# EAGLE board board (EAGLE 7.3.0)
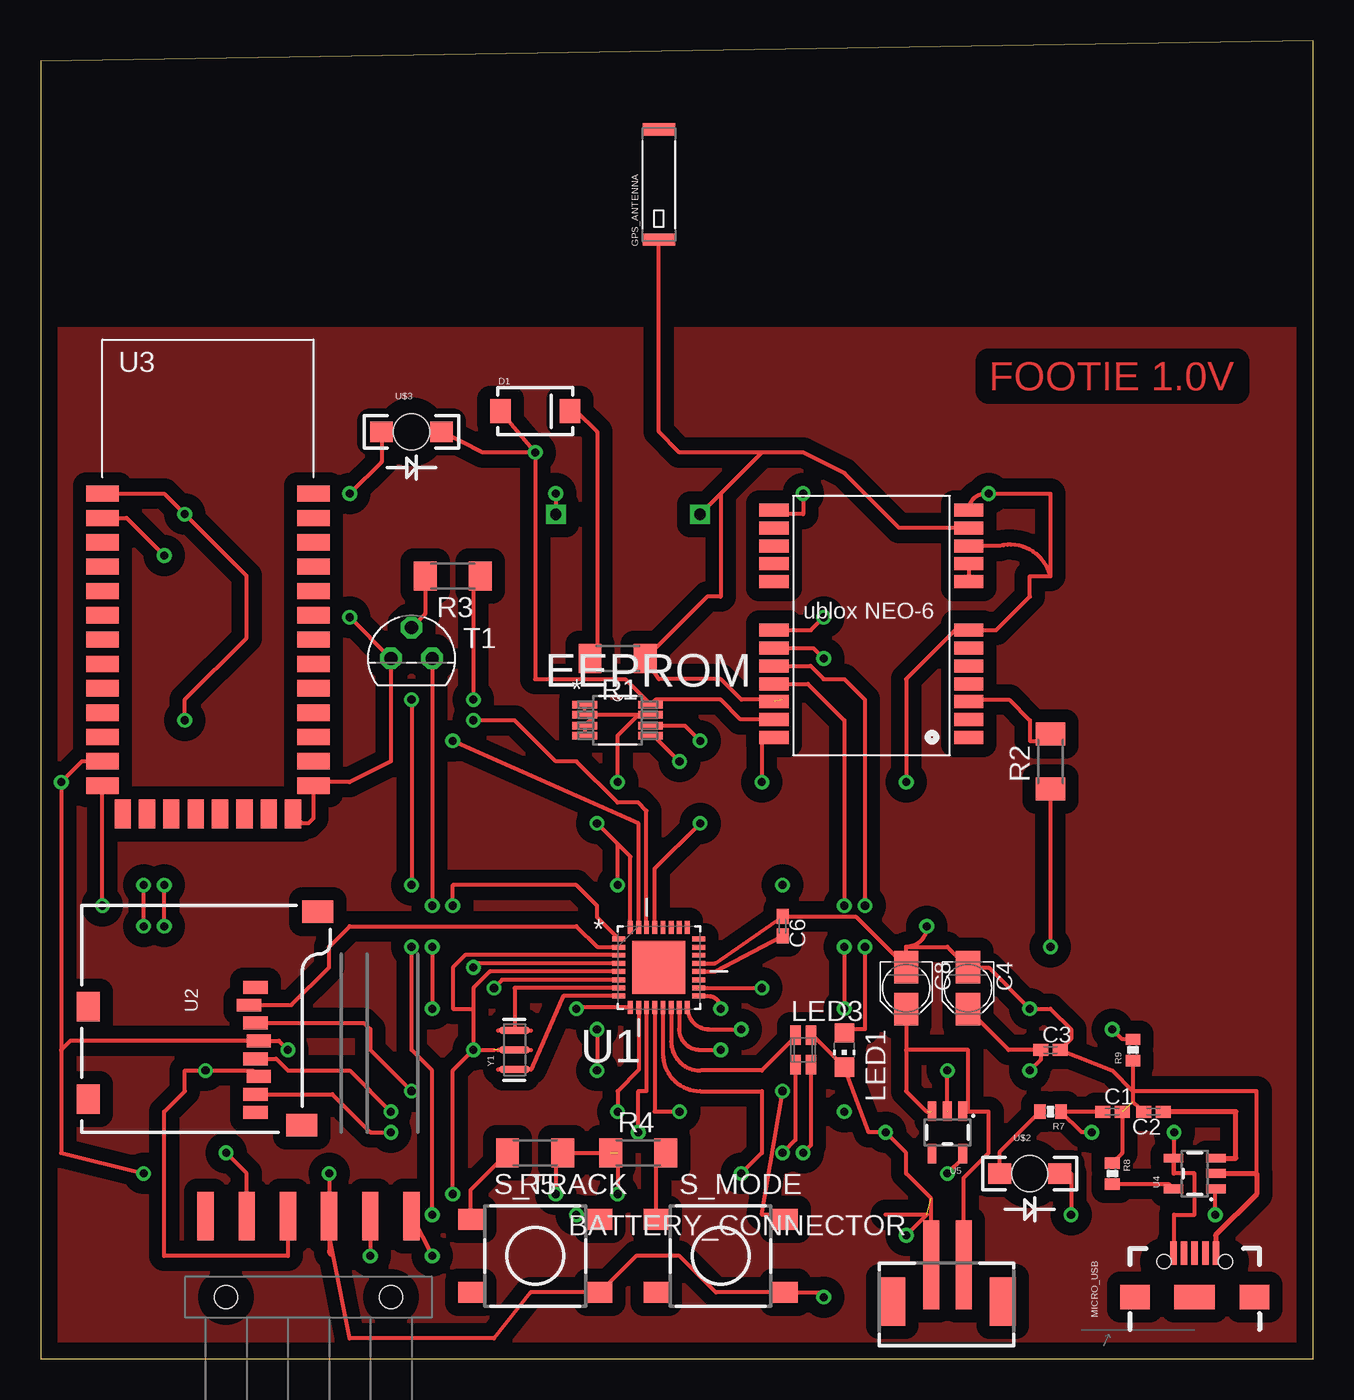
[diagram p0: board, top side]
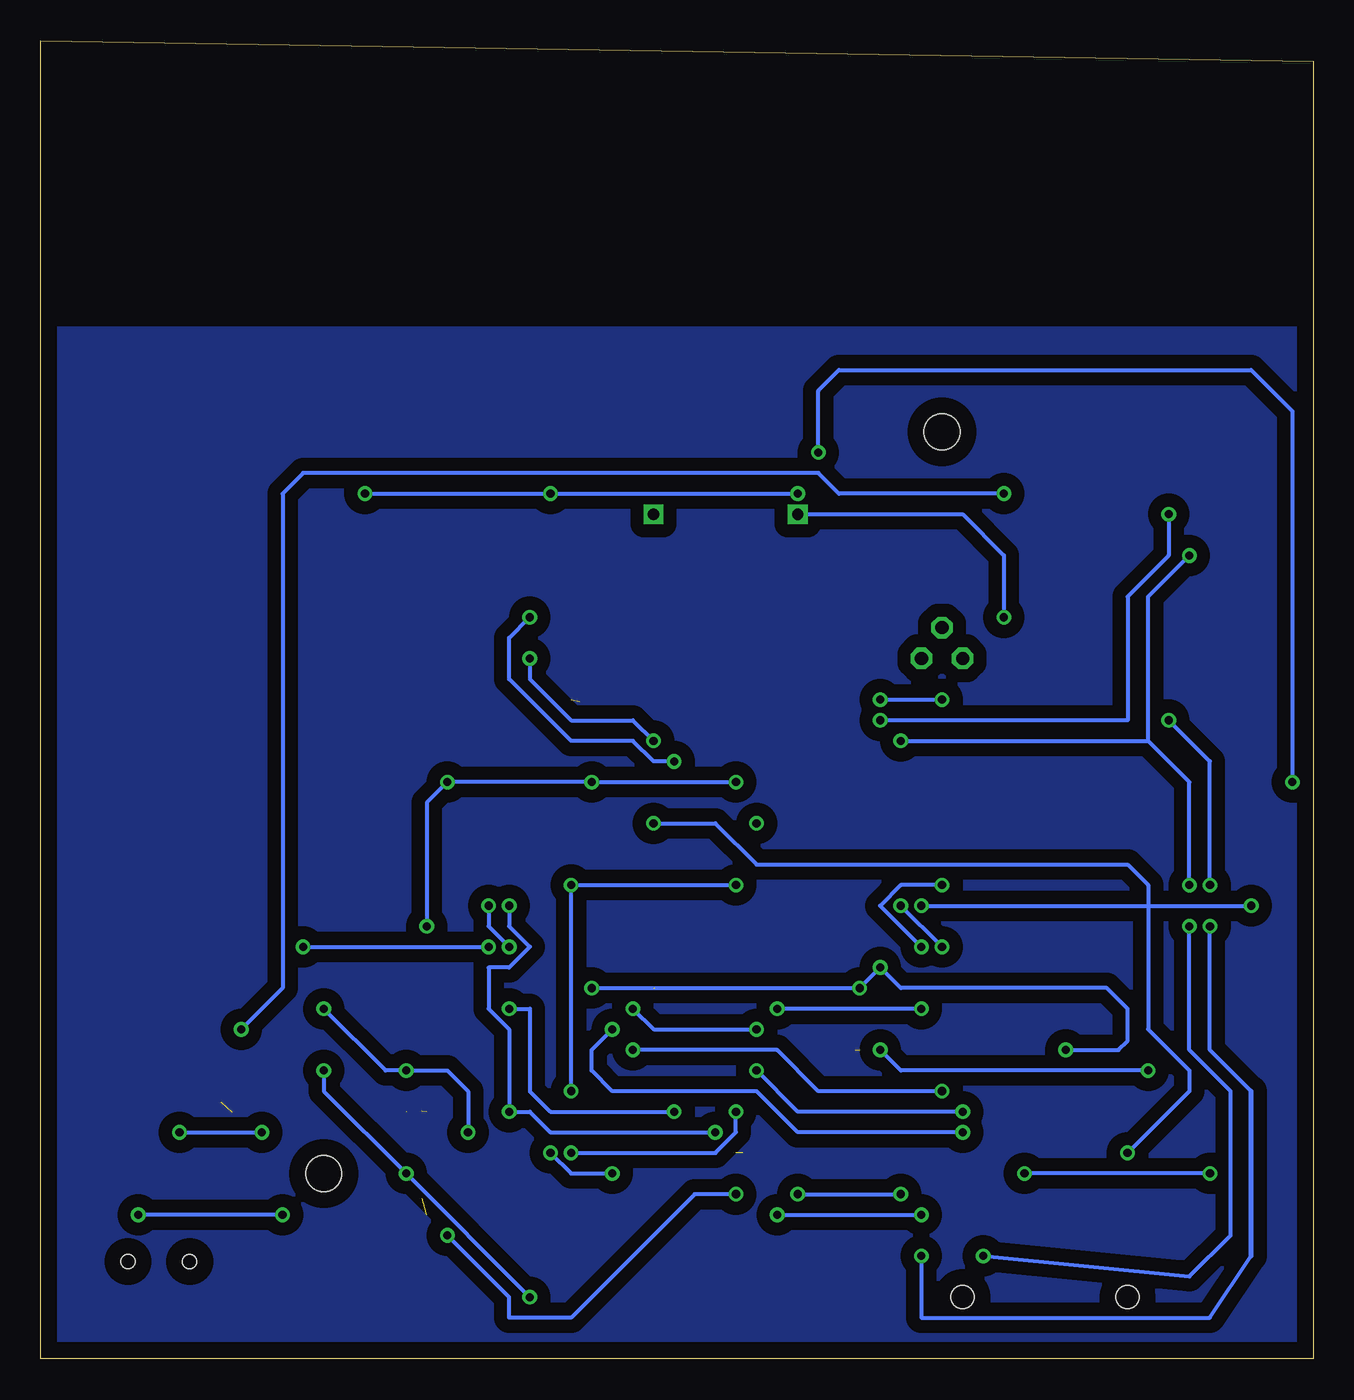
[diagram p1: board, bottom side, seen from below]

Size 78.41 x 81.27 mm. Coordinates in mm from the lower left corner, seen from the top.
Outline: 0,0 78.41,0 78.41,81.27 0,80 0,0
Copper layers (1*16): Top 0.035mm / dielectric 1.5mm / Bottom 0.035mm
Design rules "default": minimum track width 10mil, minimum drill 24mil, track to track 8mil, track to pad 8mil, pad to pad 8mil, via to via 8mil, smd to smd 8mil, copper to edge 40mil, drill to drill 8mil, minimum pad ring 10mil, minimum via ring 8mil, stop-mask expansion 4mil, vias tented up to drill 0mil, thermal gap 10mil

## Footprints (pad centres in the part's own frame; a part is rotated, then mirrored left to right if it is on the bottom)
JST-2-SMD-VERT = smd 1 x 5.5: GND 1,-2; VCC -1,-2 | smd 1.6 x 3: P$1 -3.4,0.27; P$2 3.4,0.27
C0402K = smd 0.925 x 0.74: 1 -0.6,0; 2 0.6,0
PANASONIC_A = smd 2 x 1.5: + 1.3,0; - -1.3,0
SMA-DIODE = smd 1.27 x 1.47: A -2.15,0; C 2.15,0
SOP65P490X110-8N = smd 1.524 x 0.457: 1 -2.032,0.965; 2 -2.032,0.33; 3 -2.032,-0.33; 4 -2.032,-0.965; 5 2.032,-0.965; 6 2.032,-0.33; 7 2.032,0.33; 8 2.032,0.965
ANTENNA-CHIP6 = smd 0.75 x 2: 1 -3.4,0; NC 3.4,0
1X06-SMD = smd 1 x 3: 1 -6.35,5; 2 -3.81,5; 3 -1.27,5; 4 1.27,5; 5 3.81,5; 6 6.35,5 | hole 1.4: -5.08,0; 5.08,0
CHIP-LED0805 = smd 1.2 x 1.2: A 0,-1.05; C 0,1.05
GM1WA55311A = smd 0.65 x 1.2: 1 -0.475,0.9; 2 -0.475,-0.9; 3 0.475,-0.9; 4 0.475,0.9
USB-B-MICRO-SMD_V03 = smd 1.45 x 0.4: D+1 2.725,0; D-1 2.725,0.65; GND1 2.725,-1.3; ID1 2.725,-0.65; VBUS1 2.725,1.3 | smd 1.5 x 1.8: SHIELD1 0,3.685; SHIELD2 0,-3.685 | smd 1.5 x 2.5: SHIELD3 0,0 | hole 0.85: 2.2,1.9; 2.2,-1.9
M1406 = smd 1.4 x 1.8: 1 -1.7,0; 2 1.7,0
0402-RES = smd 0.7 x 0.9: 1 -0.65,0; 2 0.65,0
DTSM-6 = smd 1.55 x 1.3: 1 -3.975,2.25; 2 3.975,2.25; 3 -3.975,-2.25; 4 3.975,-2.25
TO92 = drill 0.813 octagon: 1 1.27,0; 2 0,1.905; 3 -1.27,0
QFN50P500X500X100-33N = smd 0.813 x 0.305: 1 -2.464,1.753; 2 -2.464,1.245; 3 -2.464,0.762; 4 -2.464,0.254; 5 -2.464,-0.254; 6 -2.464,-0.762; 7 -2.464,-1.245; 8 -2.464,-1.753; 17 2.464,-1.753; 18 2.464,-1.245; 19 2.464,-0.762; 20 2.464,-0.254; 21 2.464,0.254; 22 2.464,0.762; 23 2.464,1.245; 24 2.464,1.753 | smd 0.305 x 0.813: 9 -1.753,-2.464; 10 -1.245,-2.464; 11 -0.762,-2.464; 12 -0.254,-2.464; 13 0.254,-2.464; 14 0.762,-2.464; 15 1.245,-2.464; 16 1.753,-2.464; 25 1.753,2.464; 26 1.245,2.464; 27 0.762,2.464; 28 0.254,2.464; 29 -0.254,2.464; 30 -0.762,2.464; 31 -1.245,2.464; 32 -1.753,2.464 | smd 3.251 x 3.251: 33 0,0
MICRO-SD-SOCKET-PP = smd 0.8 x 1.5: 1 -8.94,10.7; 2 -7.84,10.3; 3 -6.74,10.7; 4 -5.64,10.9; 5 -4.54,10.7; 6 -3.44,10.9; 7 -2.34,10.7; 8 -1.24,10.7 | smd 1.8 x 1.4: CD1 -2.05,0.4; CD2 -7.75,0.4 | smd 1.4 x 1.9: GND1 -13.6,14.55; GND3 -0.45,13.55
BLUETOOTH_SMD = smd 2 x 1: 1 0,0; 2 0,-1.5; 3 0,-3; 4 0,-4.5; 5 0,-6; 6 0,-7.5; 7 0,-9; 8 0,-10.5; 9 0,-12; 10 0,-13.5; 11 0,-15; 12 0,-16.5; 13 0,-18; 22 13,-18; 23 13,-16.5; 24 13,-15; 25 13,-13.5; 26 13,-12; 27 13,-10.5; 28 13,-9; 29 13,-7.5; 30 13,-6; 31 13,-4.5; 32 13,-3; 33 13,-1.5; 34 13,0 | smd 1 x 1.8: 14 1.25,-19.75; 15 2.75,-19.75; 16 4.25,-19.75; 17 5.75,-19.75; 18 7.25,-19.75; 19 8.75,-19.75; 20 10.25,-19.75; 21 11.75,-19.75
SOT23-5 = smd 0.55 x 1.2: 1 -0.95,-1.3; 2 0,-1.3; 3 0.95,-1.3; 4 0.95,1.3; 5 -0.95,1.3
UBLOX_NEO-6P = smd 1.8 x 0.8: 1_RESERVED 6.4,-7.4; 2_SS_N 6.4,-6.3; 3_TIMEPULSE 6.4,-5.2; 4_EXTINT0 6.4,-4.1; 5_USB_DM 6.4,-3; 6_USB_DP 6.4,-1.9; 7_VDDUSB 6.4,-0.8; 8_RESERVED 6.4,2.2; 9_VCC_RF 6.4,3.3; 10_GND 6.4,4.4; 11_RF_IN 6.4,5.5; 12_GND 6.4,6.6; 13_GND -5.6,6.6; 14_MOSI/CFG_COM0 -5.6,5.5; 15_MISO/CFG_COM1 -5.6,4.4; 16_CFG_CPS0/SCK -5.6,3.3; 17_RESERVED -5.6,2.2; 18_SDA2 -5.6,-0.8; 19_SCL2 -5.6,-1.9; 20_TXD1 -5.6,-3; 21_RXD1 -5.6,-4.1; 22_V_BCKP -5.6,-5.2; 23_VCC -5.6,-6.3; 24_GND -5.6,-7.4
HSMC-C265 = smd 1.4 x 1.25: A -1.85,0; C 1.85,0 | hole 2.2: 0,0
VL1220 = drill 0.7 pad 0.75 square: 3V 0,0; GND 8.89,0
RESONATOR-SMD = smd 0.45 x 1.905: 1 -1.2,0; 2 0,0; 3 1.2,0

## Placement (x,y rotation side)
BATTERY_CONNECTOR  3.7v  [JST-2-SMD-VERT]  55.88,3.81 180 top
C1  4.7 uF  [C0402K]  66.04,15.24 0 top
C2  4.7 uF  [C0402K]  68.58,15.24 180 top
C3  4.7 uF  [C0402K]  62.23,19.05 0 top
C4  10 uf  [PANASONIC_A]  57.15,22.86 270 top
C6  0.1 uF  [C0402K]  45.72,26.67 270 top
C8  10 uf  [PANASONIC_A]  53.34,22.86 270 top
D1  [SMA-DIODE]  30.48,58.42 0 top
EEPROM  24LC32A-I/MS  [SOP65P490X110-8N]  35.56,39.37 0 top
GPS_ANTENNA  ANTENNA2SMD6  [ANTENNA-CHIP6]  38.1,72.39 90 top
JP1  RA 6Pin SMD  [1X06-SMD]  16.51,3.81 0 top
LED1  [CHIP-LED0805]  49.53,19.05 180 top
LED3  GM1WA55311A  [GM1WA55311A]  46.99,19.05 0 top
MICRO_USB  5V  [USB-B-MICRO-SMD_V03]  71.12,3.81 90 top
R1  [M1406]  35.56,43.18 180 top
R2  [M1406]  62.23,36.83 90 top
R3  100 ohm  [M1406]  25.4,48.26 180 top
R4  [M1406]  36.83,12.7 0 top
R5  [M1406]  30.48,12.7 180 top
R7  330  [0402-RES]  62.23,15.24 180 top
R8  2K  [0402-RES]  66.04,11.43 270 top
R9  10k  [0402-RES]  67.31,19.05 90 top
S_MODE  DTSM-6  [DTSM-6]  41.91,6.35 0 top
S_TRACK  DTSM-6  [DTSM-6]  30.48,6.35 0 top
T1  2N3565  [TO92]  22.86,43.18 0 top
U1  ATMEGA328P-MU  [QFN50P500X500X100-33N]  38.1,24.13 0 top
U2  USD-SOCKETNEW  [MICRO-SD-SOCKET-PP]  2.54,13.97 270 top
U3  HC_05  [BLUETOOTH_SMD]  3.81,53.34 0 top
U4  MCP73831  [SOT23-5]  71.12,11.43 90 top
U5  3.3 regulator  [SOT23-5]  55.88,13.97 180 top
U$1  UBLOX_NEO-6  [UBLOX_NEO-6P]  50.8,45.72 0 top
U$2  HSMC-C265  [HSMC-C265]  60.96,11.43 0 top
U$3  HSMC-C265  [HSMC-C265]  22.86,57.15 0 top
U$4  VL1220/HFN  [VL1220]  40.64,52.07 180 top
Y1  8MHZ  [RESONATOR-SMD]  29.21,19.05 90 top

## Library data of the parts
BATTERY_CONNECTOR = SparkFun-Connectors
C1-C4 C6 C8 = resistor
D1 = SparkFun-DiscreteSemi
EEPROM = Microchip_By_element14_Batch_1; MPN: 24LC32A-I/MS; OC_FARNELL: 1331330; OC_NEWARK: 69K7672; PACKAGE: 8MSOP; SUPPLIER: Microchip
GPS_ANTENNA = SparkFun-RF
JP1 = SparkFun-Connectors; PROD_ID: CONN-08971
LED1 LED3 = led
MICRO_USB = SparkFun-Connectors; PROD_ID: CONN-11752
R1-R5 = resistor; OHM: 1k
R7-R9 = SparkFun-Passives
S_MODE S_TRACK = switch-tact; OC_FARNELL: unknown
T1 = transistor
U1 = Atmel_By_element14_Batch_1-00; MPN: ATMEGA328P-MU; OC_FARNELL: 1748522; OC_NEWARK: 26R2526; PACKAGE: QFN-32; SUPPLIER: Atmel
U2 = SparkFun-Connectors; PROD_ID: CONN-07820
U3 = SerialPortBluetooth
U4 = SparkFun-PowerIC; PROD_ID: IC-09995
U5 = SparkFun-PowerIC; PROD_ID: VREG-00822
U$1 = Ava
U$2 U$3 = SparkFun-Retired
U$4 = footie
Y1 = SparkFun-FreqCtrl; PROD_ID: XTAL-08900

## Nets
+3V3: C3.1 C4.+ D1.A EEPROM.8 JP1.4 S_MODE.4 S_TRACK.4 U1.4 U1.6 U1.18 U2.4 U3.12 U5.5 U$1.23_VCC U$3.C
ARDUINO_RX: JP1.6 U1.30 U3.1
ARDUINO_TX: JP1.5 U1.31 U3.2
D2: S_MODE.2 U1.32
D3: S_TRACK.2 U1.1
D5: R3.1 U1.9
D6: LED3.2 U1.10
D9: LED3.3 U1.13
D10: LED3.1 U1.14
DTR: JP1.2 U1.29
GPSRX: U1.11 U$1.21_RXD1
GPSTX: U1.12 U$1.20_TXD1
N$1: D1.C R1.2
N$2: C1.1 MICRO_USB.VBUS1 R7.1 U4.4
N$3: R2.2 U$1.3_TIMEPULSE
N$4: LED1.A R2.1
N$5: U$1.8_RESERVED U$1.9_VCC_RF
N$6: R1.1 U$1.22_V_BCKP U$4.3V
N$7: GPS_ANTENNA.1 U$1.11_RF_IN
N$8: R7.2 U$2.A
N$9: R4.2 S_MODE.1
N$10: R5.2 S_TRACK.1
N$11: U4.1 U$2.C
N$12: BATTERY_CONNECTOR.VCC C8.+ U5.1 U5.3
N$13: U1.8 Y1.1
N$14: U1.7 Y1.3
N$15: R8.2 U4.5
N$16: R9.2 U$3.A
N$17: C6.2 U1.20
N$19: R3.2 T1.2
N$20: T1.1 U3.13
N$22: BATTERY_CONNECTOR.GND C1.2 C2.2 C3.2 C4.- C6.1 C8.- EEPROM.1 EEPROM.2 EEPROM.3 EEPROM.4 EEPROM.7 JP1.3 LED1.C LED3.4 MICRO_USB.GND1 R4.1 R5.1 R8.1 R9.1 T1.3 U1.3 U1.5 U1.21 U2.6 U3.21 U3.22 U4.2 U5.2 U$1.7_VDDUSB U$1.10_GND U$1.12_GND U$1.13_GND U$1.24_GND U$4.GND Y1.2
SCL: EEPROM.6 U$1.19_SCL2
SD_CS: U1.2 U2.2
SD_MISO: U1.16 U2.7
SD_MOSI: U1.15 U2.3
SD_SCK: U1.17 U2.5
SDA: EEPROM.5 U$1.18_SDA2
VCC: C2.1 U4.3

## Tracks (layer width: path | path; a pad name or v marks a point on that pad's centre or on a via)
+3V3  (via drill 0.5, 0.5 pad 0.25)  (1 unrouted)
  Top 0.254: v30.48,55.88 27.25,55.88 U$3.C | 18.02,6.4 19.05,1.27 27.94,1.27 30.19,4.1 S_TRACK.4 36.7,6.35 39.37,6.35 41.62,4.1 S_MODE.4 47.97,4.1 v48.26,3.81 | 18.02,6.4 17.78,7.62 | v17.78,11.43 JP1.4 17.78,6.64 arc90 18.02,6.4 | v6.35,11.43 1.27,12.7 1.27,19.05 | 1.27,19.05 v1.27,35.56 2.54,36.83 U3.12 | 1.27,19.05 1.83,19.61 U2.4 14.68,19.61 v15.24,19.05 | U1.6 28.45,23.37 v27.94,22.86 | U1.4 26.92,24.38 v26.67,24.13 | D1.A v30.48,55.88 | v30.48,55.88 30.48,41.91 36.02,41.91 EEPROM.8 37.9,40.64 41.91,40.64 43.13,39.42 U$1.23_VCC | C4.+ 57.15,21.59 | C4.+ 57.18,21.56 | U5.5 56.83,12.38 v55.88,11.43 | v60.96,17.78 61.63,18.45 C3.1 59.66,19.05 C4.+ | 40.64,22.86 v44.45,22.86
  Bottom 0.254: v6.35,11.43 v17.78,11.43 | v15.24,19.05 11.99,19.05 11.43,19.61 11.43,21.59 12.7,22.86 25.4,22.86 v26.67,24.13 v27.94,22.86 v44.45,22.86 | v30.48,55.88 30.48,59.69 29.21,60.96 3.81,60.96 1.27,58.42 v1.27,35.56 | v48.26,3.81 v55.88,11.43 60.96,16.51 v60.96,17.78
ARDUINO_RX  (via drill 0.5)
  Top 0.254: U3.1 7.62,53.34 v8.89,52.07 12.7,48.26 12.7,44.45 8.89,40.64 v8.89,39.37 | U1.30 37.34,33.78 36.83,34.29 35.56,34.29 33.02,36.83 31.75,36.83 29.21,39.37 v26.67,39.37 | JP1.6 v24.13,6.35 | v6.35,26.67 v6.35,29.21
  Bottom 0.254: v8.89,52.07 8.89,49.53 11.43,46.99 11.43,39.37 v26.67,39.37 | v24.13,6.35 24.13,2.54 6.35,2.54 3.81,6.35 | 3.81,16.51 6.35,19.05 v6.35,26.67 | v6.35,29.21 6.35,36.83 v8.89,39.37
  Bottom 0.305: 3.81,6.35 3.81,16.51
ARDUINO_TX  (via drill 0.5)
  Top 0.254: U1.31 36.85,33 v25.4,38.1 | U3.2 5.31,51.84 v7.62,49.53 | JP1.5 v20.32,6.35 | v7.62,26.67 v7.62,29.21
  Bottom 0.254: v25.4,38.1 10.16,38.1 | 10.16,38.1 10.16,46.99 v7.62,49.53 | v20.32,6.35 7.62,5.08 5.08,7.62 5.08,16.51 7.62,19.05 v7.62,26.67 | v7.62,29.21 7.62,35.56 10.16,38.1
D2  (via drill 0.5)
  Top 0.254: U1.32 36.35,30.96 35.56,31.75 | 35.56,31.75 v34.29,33.02 | v45.72,16.51 44.45,8.89 45.72,8.89 S_MODE.2 | v35.56,29.21 35.56,31.75
  Bottom 0.254: v45.72,16.51 v45.72,29.21 v35.56,29.21
D3  (via drill 0.5)
  Top 0.254: v25.4,27.94 25.4,29.21 33.02,29.21 34.29,27.94 34.29,27.23 U1.1 | v22.86,25.4 22.86,19.05 24.13,17.78 v24.13,8.89 | v33.02,8.89 34.29,8.89 S_TRACK.2
  Bottom 0.254: v22.86,25.4 v25.4,27.94 | v33.02,8.89 v24.13,8.89
D5  (via drill 0.5)
  Top 0.254: v24.13,25.4 v24.13,21.59 | v22.86,40.64 v22.86,29.21 | v26.67,40.64 26.67,48.26 R3.1 | U1.9 33.1,21.67 arc90 v33.02,21.59
  Bottom 0.254: v24.13,21.59 v33.02,21.59 | v24.13,25.4 26.67,27.94 25.4,29.21 v22.86,29.21 | v26.67,40.64 v22.86,40.64
D6  (via drill 0.5)
  Top 0.254: LED3.2 46.52,13.49 v45.72,12.7 | U1.10 36.85,17.8 35.56,16.51 v35.56,15.24
  Bottom 0.254: v45.72,12.7 36.83,12.7 35.56,13.97 v35.56,15.24
D9  (via drill 0.5)
  Top 0.254: U1.13 38.35,18.8 arc90 40.64,16.51 44.45,16.51 44.45,12.7 v43.18,11.43 | LED3.3 47.46,13.17 v46.99,12.7
  Bottom 0.254: v46.99,12.7 45.72,11.43 v43.18,11.43
D10
  Top 0.254: U1.14 38.86,19.56 arc90 40.64,17.78 44.45,17.78 46.52,19.84 LED3.1
DTR  (via drill 0.5)
  Top 0.254: U1.29 37.85,30.23 v40.64,33.02 | JP1.2 12.7,11.43 v11.43,12.7
  Bottom 0.254: v40.64,33.02 36.83,33.02 34.29,30.48 11.43,30.48 10.16,29.21 10.16,20.32 7.62,17.78 7.62,16.51 v11.43,12.7
GND
  pour Top (isolate 0.813): 0,0 0,63.5 78.74,63.5 78.74,0
  pour Bottom (isolate 0.813): 0,0 0,63.5 78.74,63.5 78.74,0
GPSRX  (via drill 0.5)
  Top 0.254: U1.11 37.34,16.51 36.83,16.51 v36.83,13.97 | U$1.21_RXD1 47.28,41.62 49.53,39.37 v49.53,27.94
  Bottom 0.254: v49.53,27.94 49.53,26.67 48.26,25.4 49.53,24.13 50.8,24.13 50.8,21.59 49.53,20.32 v49.53,15.24 48.26,15.24 46.99,13.97 v36.83,13.97
GPSTX  (via drill 0.5)
  Top 0.254: U1.12 37.85,15.24 v39.37,15.24 | U$1.20_TXD1 47.45,42.72 48.26,41.91 49.53,41.91 50.8,40.64 v50.8,27.94 | v49.53,25.4 v49.53,21.59
  Bottom 0.254: v49.53,21.59 48.26,21.59 48.26,16.51 46.99,15.24 v39.37,15.24 | v49.53,25.4 50.8,26.67 v50.8,27.94
N$1
  Top 0.254: D1.C 33.02,58.42 34.29,57.15 34.29,43.61 R1.2
N$2  (via drill 0.5 pad 0.25)
  Top 0.254: MICRO_USB.VBUS1 69.85,6.54 69.85,8.89 71.12,8.89 71.12,11.43 69.85,11.43 | 69.85,11.43 69.82,11.43 U4.4 | 69.85,11.43 v69.85,13.97 | v64.77,13.97 64.15,13.97 R7.1 C1.1
  Bottom 0.254: v69.85,13.97 v64.77,13.97
N$3
  Top 0.254: R2.2 62.23,38.1 60.96,38.1 60.96,39.37 59.69,40.64 57.15,40.64 U$1.3_TIMEPULSE
N$4  (via drill 0.5)
  Top 0.254: v50.8,25.4 50.8,20.32 49.53,20.32 LED1.A | v62.23,25.4 R2.1 62.23,35.56
  Bottom 0.254: v62.23,25.4 v50.8,25.4
N$5
  Top 0.254: U$1.9_VCC_RF U$1.8_RESERVED
N$6  (1 unrouted)
  Top 0.254: 41.91,53.34 41.91,46.99 41.07,46.99 R1.1 38.1,41.91 41.91,41.91 43.18,40.64 45.72,40.64 | 44.45,55.88 41.91,53.34 | U$4.3V 41.91,53.34
N$7
  Top 0.254: U$1.11_RF_IN 52.92,51.22 49.53,54.61 46.99,55.88 39.37,55.88 38.1,57.15 GPS_ANTENNA.1
N$8
  Top 0.254: U$2.A 59.11,12.77 R7.2
N$9
  Top 0.254: S_MODE.1 37.94,12.11 R4.2
N$10
  Top 0.254: S_TRACK.1 26.5,10.42 R5.2
N$11  (via drill 0.5 pad 0.25)
  Top 0.254: v63.5,8.89 63.5,11.43 U$2.C | v72.39,8.89 72.39,10.45 U4.1
  Bottom 0.254: v63.5,8.89 v72.39,8.89
N$12  (1 unrouted)
  Top 0.254: BATTERY_CONNECTOR.VCC 56.88,11.16 58.42,12.7 58.42,15.24 57.15,15.24 | 57.15,15.24 56.86,15.24 U5.1 | 57.15,15.24 57.15,19.05 53.34,19.05 | 53.34,19.05 53.34,16.51 54.61,15.24 | C8.+ 53.34,19.05
N$13
  Top 0.254: U1.8 32.21,22.38 30.23,17.85
N$14
  Top 0.254: U1.7 29.23,22.88 29.21,22.86 Y1.3
N$15
  Top 0.254: R8.2 69.52,10.78 U4.5
N$16  (via drill 0.5)
  Top 0.254: R9.2 66.66,19.7 v66.04,20.32 | U$3.A 21.01,55.3 v19.05,53.34
  Bottom 0.254: v19.05,53.34 29.21,53.34 30.48,54.61 62.23,54.61 63.5,53.34 63.5,22.86 v66.04,20.32
N$17
  Top 0.254: U1.20 41.56,23.88 C6.2
N$19
  Top 0.254: R3.2 23.7,45.93 T1.2
N$20  (via drill 0.5 pad 0.25)
  Top 0.254: v3.81,27.94 U3.13 3.81,35.56 | T1.1 v24.13,27.94
  Bottom 0.254: v24.13,27.94 v3.81,27.94
N$22  (via drill 0.5, 0.5 pad 0.25)  (5 unrouted)
  Top 0.254: 55.88,15.24 v55.88,17.78 | 72.39,11.43 74.93,11.43 74.93,16.51 67.31,16.51 | 67.31,16.51 67.31,15.84 C2.2 | R9.1 67.31,16.51 | C1.2 66.64,12.68 R8.1 | 62.23,48.26 60.96,48.26 60.96,46.99 58.89,44.92 U$1.7_VDDUSB 56.35,44.92 53.34,41.91 v53.34,35.56 | 62.23,48.26 arc90 59.1,50.12 U$1.10_GND | U$1.12_GND arc-90 58.22,53.34 v58.42,53.34 62.23,53.34 62.23,48.26 | v46.99,53.34 46.99,52.07 45.72,52.07 U$1.13_GND | v31.75,53.34 U$4.GND | EEPROM.7 36.83,39.7 | 36.83,39.7 34.19,39.7 34.07,39.59 | 34.07,39.59 EEPROM.3 EEPROM.4 | EEPROM.1 EEPROM.2 33.96,39.7 34.07,39.59 | v44.45,35.56 44.45,38.1 U$1.24_GND | v35.56,35.56 35.56,38.43 36.83,39.7 | R4.1 R5.1 31.75,12.7 v31.75,10.16 | JP1.3 15.24,6.35 7.62,6.35 7.62,15.24 8.89,16.51 8.89,17.78 v10.16,17.78 13.07,17.78 U2.6 | U3.21 16.13,33.02 16.51,33.02 16.81,33.32 U3.22 17.03,35.56 19.05,35.56 21.59,36.83 T1.3 v19.05,45.72 | v26.67,19.05 27.94,19.05 | v26.67,19.05 25.4,17.78 v25.4,10.16 | LED3.4 47.58,19.95 LED1.C 51.02,13.97 v52.07,13.97 53.34,12.7 53.34,11.43 54.88,9.89 BATTERY_CONNECTOR.GND | U1.5 27.69,23.88 26.67,22.86 26.67,21.59 | 26.67,21.59 v26.67,19.05 | U1.3 26.16,24.89 25.4,24.13 25.4,21.59 26.67,21.59 | U1.21 41.56,24.38 C6.1 50.23,27.27 C8.- | 57.15,24.13 55.88,25.4 53.34,25.4 | C8.- 53.34,25.4 | 53.34,24.13 C8.- | 57.15,24.13 58.42,24.13 v60.96,21.59 62.23,21.59 63.5,20.32 63.5,19.72 C3.2 66.04,17.78 67.31,16.51 | 57.15,24.13 C4.- | 35.56,12.7 v35.56,10.16 | v53.34,7.62 54.61,8.89 52.07,8.89 | v54.61,26.67 arc-90 53.34,25.4
  Top 0.305: 72.39,11.43 U4.2 74.93,11.43 74.93,10.16 72.39,7.62 72.42,7.62 MICRO_USB.GND1
  Bottom 0.254: v58.42,53.34 v46.99,53.34 v31.75,53.34 | v35.56,35.56 v44.45,35.56 v53.34,35.56 54.61,34.29 v54.61,26.67 | v26.67,19.05 25.4,17.78 v10.16,17.78 | v31.75,10.16 v25.4,10.16 | U$4.GND 21.59,52.07 19.05,49.53 v19.05,45.72 | v52.07,13.97 52.07,16.51 53.34,17.78 v55.88,17.78 57.15,17.78 v60.96,21.59 | v35.56,10.16 38.1,10.16 45.72,2.54 49.53,2.54 49.53,3.81 v53.34,7.62
SCL  (via drill 0.5)
  Top 0.254: EEPROM.6 39.7,39.04 v40.64,38.1 | U$1.19_SCL2 47.62,43.82 v48.26,43.18
  Bottom 0.254: v48.26,43.18 48.26,41.91 45.72,39.37 41.91,39.37 v40.64,38.1
SD_CS
  Top 0.254: U2.2 15.46,21.81 17.78,24.13 17.78,25.4 19.05,26.67 33.02,26.67 34.29,25.4 35.61,25.4 U1.2
SD_MISO  (via drill 0.5)
  Top 0.254: U1.16 arc90 41.2,20.32 v43.18,20.32 | U2.7 17.98,16.31 20.32,13.97 v21.59,13.97
  Bottom 0.254: v21.59,13.97 31.75,13.97 34.29,16.51 43.18,16.51 44.45,17.78 44.45,19.05 v43.18,20.32
SD_MOSI  (via drill 0.5)
  Top 0.254: U1.15 39.34,20.34 arc90 40.64,19.05 v41.91,19.05 | U2.3 19.93,20.71 20.32,20.32 20.32,19.05 v22.86,16.51
  Bottom 0.254: v22.86,16.51 30.48,16.51 33.02,19.05 v41.91,19.05
SD_SCK  (via drill 0.5)
  Top 0.254: U2.5 14.51,18.51 15.24,17.78 19.05,17.78 v21.59,15.24 | U1.17 41.12,22.38 arc-90 v41.91,21.59 | v34.29,20.32 v34.29,17.78
  Bottom 0.254: v21.59,15.24 31.75,15.24 v34.29,17.78 | v41.91,21.59 40.64,20.32 v34.29,20.32
SDA  (via drill 0.5)
  Top 0.254: U$1.18_SDA2 47.46,44.92 v48.26,45.72 | EEPROM.5 37.8,38.41 v39.37,36.83
  Bottom 0.254: v39.37,36.83 40.64,36.83 41.91,38.1 45.72,38.1 49.53,41.91 49.53,44.45 v48.26,45.72
VCC
  Top 0.305: U4.3 73.66,12.38 73.66,15.24 C2.1

## Text on the board
Top: FOOTIE 1.0V